# EAGLE board Nutzen (EAGLE 7.7.0)
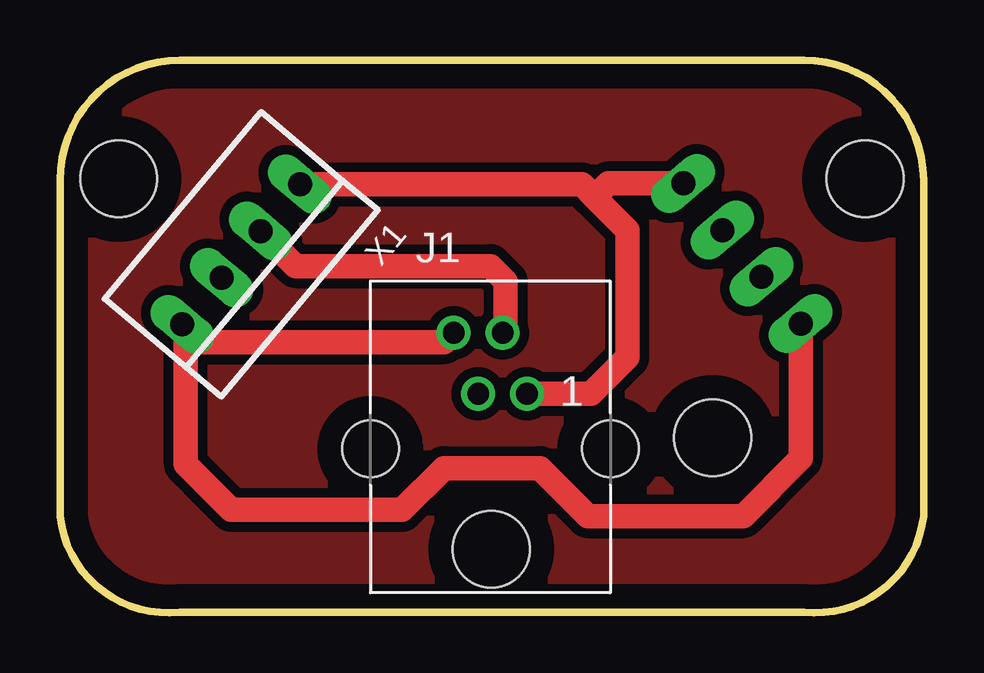
[diagram p0: board, top side]
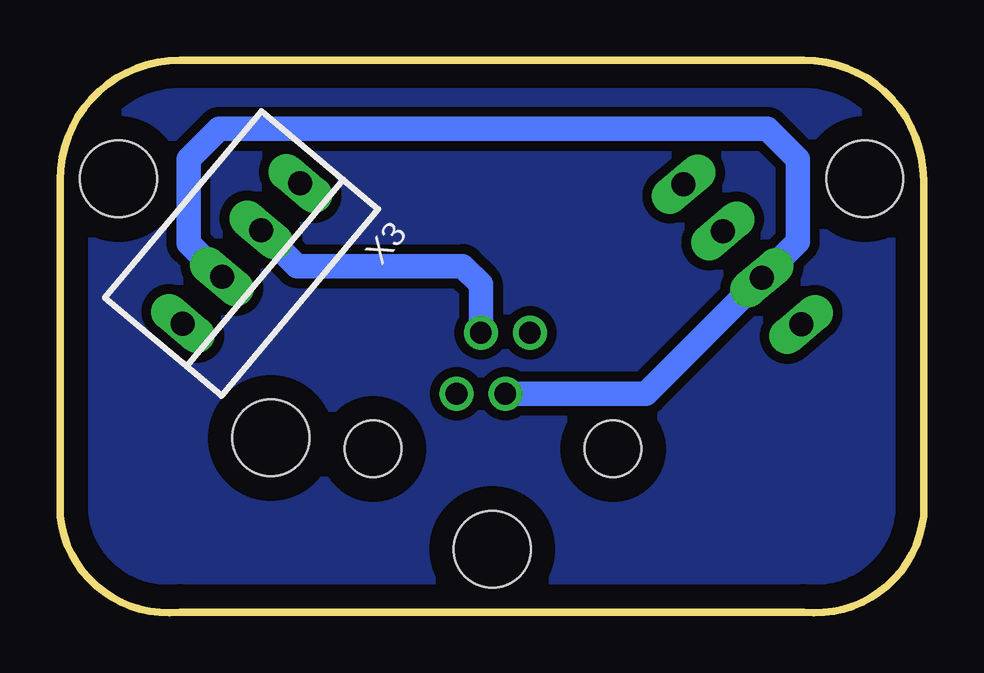
[diagram p1: board, bottom side, seen from below]

Size 36 x 23.03 mm. Coordinates in mm from the lower left corner, seen from the top.
Outline: 5,23.03 31,23.03 arc-90 36,18.03 36,4.03 arc-90 31,0.03 5,0.03 arc-90 0,4.03 0,18.03 arc-90 5,23.03
Copper layers (1*16): Top 0.035mm / dielectric 1.5mm / Bottom 0.035mm
Design rules "default": minimum track width 10mil, minimum drill 24mil, track to track 8mil, track to pad 8mil, pad to pad 8mil, via to via 8mil, smd to smd 8mil, copper to edge 40mil, drill to drill 8mil, minimum pad ring 10mil, minimum via ring 8mil, stop-mask expansion 4mil, vias tented up to drill 0mil, thermal gap 10mil
Holes 3.2 mm at 2.44,18.08 27.21,7.28 33.56,18.08 17.98,2.65

## Footprints (pad centres in the part's own frame; a part is rotated, then mirrored left to right if it is on the bottom)
615004143821 = drill 0.9: 1 1.53,2.3; 2 0.51,4.84; 3 -0.51,2.3; 4 -1.53,4.84 | hole 2.36: -5,0; 5,0
22-23-2041 = drill 1 long: 1 -3.81,0; 2 -1.27,0; 3 1.27,0; 4 3.81,0

## Placement (x,y rotation side)
E$1  [25X25_BEST]  6.14,4.28 10 top
J1  [615004143821]  17.94,6.82 0 top
X1  22-23-2041  [22-23-2041]  7.55,14.93 230 top
X3  22-23-2041  [22-23-2041]  28.43,14.97 230 bottom

## Library data of the parts
E$1 = !!!Platinen_Logo!!!
J1 = InputOutputIO (rev18b)
X1 X3 = con-molex; MF: MOLEX; MPN: 22-23-2041; OC_FARNELL: 1462920; OC_NEWARK: 38C0355

## Nets
N$1: J1.1 X1.1 X3.1
N$2: J1.2 X1.2 X3.2
N$3: J1.3 X1.3 X3.3
N$4: J1.4 X1.4 X3.4

## Tracks (layer width: path | path; a pad name or v marks a point on that pad's centre or on a via)
GND
  pour Bottom (isolate 0.406): 31,0.03 5,0.03 arc-90 0,4.03 0,18.03 arc-90 5,23.03 31,23.03 arc-90 36,18.03 36,4.03 arc-90
  pour Top (isolate 0.406): 31,0.03 5,0.03 arc-90 0,4.03 0,18.03 arc-90 5,23.03 31,23.03 arc-90 36,18.03 36,4.03 arc-90
N$1
  Top 1.016: X1.1 21.75,17.85 22.29,17.31 | J1.1 22.14,9.12 23.66,10.63 23.66,15.94 22.29,17.31 | X3.1 22.86,17.88 22.29,17.31
N$2
  Top 1.016: X1.2 9.83,14.44 17.94,14.44 18.57,13.81 18.57,11.79 J1.2
  Bottom 1.016: X3.2 26.12,14.44 19.21,14.44 18.45,13.68 J1.2
N$3
  Bottom 1.016: J1.3 11.57,9.12 X1.3 5.24,15.45 5.24,18.89 6.51,20.16 29.37,20.16 30.64,18.89 30.64,15.39 X3.3
N$4
  Top 1.016: J1.4 16.02,11.27 5.85,11.27 X1.4 5.24,11.87 5.24,6.19 7.14,4.28 14.26,4.28 16,6.03 20,6.03 22,4.03 28.48,4.03 30.88,6.43 X3.4